# Altium PCB FPC_15ICS_80LEDS_150MM.PcbDoc (part 1 of 2)
Units mil, origin at the board's own origin, x right, y up, seen from the top; angles counter-clockwise.
Board outline 6000 x 4000 mil, 2 copper layers (Top Layer, Bottom Layer); 126 components, 275 nets, 763 pads, 146 vias.
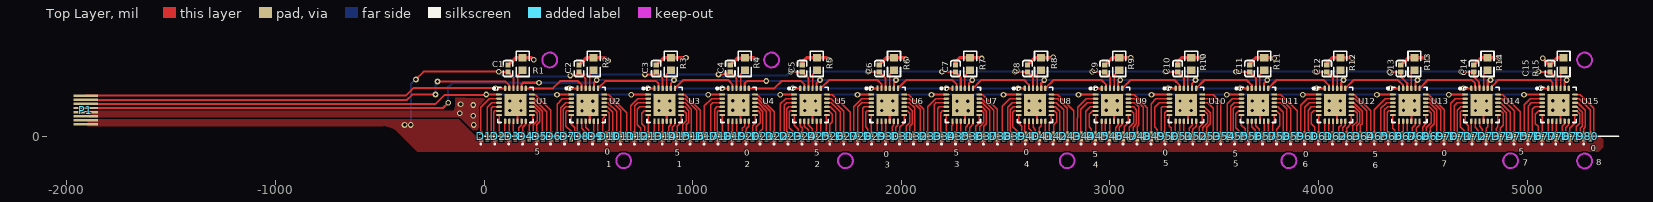
[diagram p0: Top Layer view]
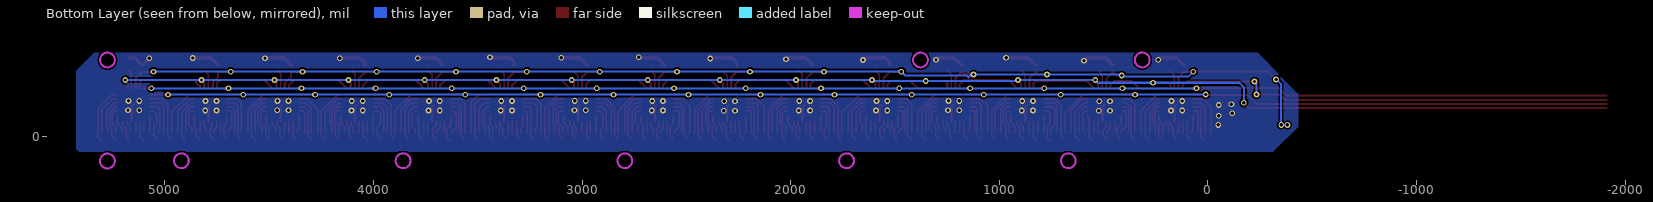
[diagram p1: Bottom Layer view, seen from below]

## Layer stack, top to bottom
Top Solder: solder mask 0.4, Solder Resist, Dk 3.5
Top Layer: signal copper 1.4
Dielectric 1: dielectric 12.6, FR-4, Dk 4.8
Bottom Layer: signal copper 1.4
Bottom Solder: solder mask 0.4, Solder Resist, Dk 3.5

## Board outline
-25770,-29925 -19770,-29925 -19770,-25925 -25770,-25925

## Design rules (kind name [scope] priority, off if disabled: settings)
Clearance [All] p1: gap=6
PolygonConnect [All] p1: connectstyle=Direct reliefconductorwidth=10 reliefentries=4 polygonreliefangle="90 Angle" airgapwidth=10
RoutingVias [All] p1: holewidth=28 width=50 viastyle="Through Hole" minholewidth=28 minwidth=50 maxholewidth=28 maxwidth=50
SolderMaskExpansion [All] p1: expansion=4
Width [All] p1: maxlimit=100 minlimit=6 preferedwidth=6
30 further rules are at their usual default settings.

## Components (designator, comment, footprint, x,y, rotation, side; value= is the part's Value field where it differs from the comment)
C1 "100nF (104) 10% 50V" 0402_C 115,325 r270 top
C2 "100nF (104) 10% 50V" 0402_C 455,325 r270 top
C3 "100nF (104) 10% 50V" 0402_C 825,325 r270 top
C4 "100nF (104) 10% 50V" 0402_C 1180,325 r270 top
C5 "100nF (104) 10% 50V" 0402_C 1525,325 r270 top
C6 "100nF (104) 10% 50V" 0402_C 1895,325 r270 top
C7 "100nF (104) 10% 50V" 0402_C 2260,325 r270 top
C8 "100nF (104) 10% 50V" 0402_C 2605,325 r270 top
C9 "100nF (104) 10% 50V" 0402_C 2975,325 r270 top
C10 "100nF (104) 10% 50V" 0402_C 3325,325 r270 top
C11 "100nF (104) 10% 50V" 0402_C 3670,325 r270 top
C12 "100nF (104) 10% 50V" 0402_C 4040,325 r270 top
C13 "100nF (104) 10% 50V" 0402_C 4395,325 r270 top
C14 "100nF (104) 10% 50V" 0402_C 4745,325 r270 top
C15 "100nF (104) 10% 50V" 0402_C 5110,325 r270 top
D1 "FC-B1010RGBT-HG-1010" LED-SMD-0.385X0.45X0.45 0,0 r0 top
D2 "FC-B1010RGBT-HG-1010" LED-SMD-0.385X0.45X0.45 66.93,0 r0 top
D3 "FC-B1010RGBT-HG-1010" LED-SMD-0.385X0.45X0.45 133.86,0 r0 top
D4 "FC-B1010RGBT-HG-1010" LED-SMD-0.385X0.45X0.45 200.79,0 r0 top
D5 "FC-B1010RGBT-HG-1010" LED-SMD-0.385X0.45X0.45 267.72,0 r0 top
D6 "FC-B1010RGBT-HG-1010" LED-SMD-0.385X0.45X0.45 334.65,0 r0 top
D7 "FC-B1010RGBT-HG-1010" LED-SMD-0.385X0.45X0.45 401.57,0 r0 top
D8 "FC-B1010RGBT-HG-1010" LED-SMD-0.385X0.45X0.45 468.5,0 r0 top
D9 "FC-B1010RGBT-HG-1010" LED-SMD-0.385X0.45X0.45 535.43,0 r0 top
D10 "FC-B1010RGBT-HG-1010" LED-SMD-0.385X0.45X0.45 602.36,0 r0 top
D11 "FC-B1010RGBT-HG-1010" LED-SMD-0.385X0.45X0.45 669.29,0 r0 top
D12 "FC-B1010RGBT-HG-1010" LED-SMD-0.385X0.45X0.45 736.22,0 r0 top
D13 "FC-B1010RGBT-HG-1010" LED-SMD-0.385X0.45X0.45 803.15,0 r0 top
D14 "FC-B1010RGBT-HG-1010" LED-SMD-0.385X0.45X0.45 870.08,0 r0 top
D15 "FC-B1010RGBT-HG-1010" LED-SMD-0.385X0.45X0.45 937.01,0 r0 top
D16 "FC-B1010RGBT-HG-1010" LED-SMD-0.385X0.45X0.45 1003.94,0 r0 top
D17 "FC-B1010RGBT-HG-1010" LED-SMD-0.385X0.45X0.45 1070.87,0 r0 top
D18 "FC-B1010RGBT-HG-1010" LED-SMD-0.385X0.45X0.45 1137.8,0 r0 top
D19 "FC-B1010RGBT-HG-1010" LED-SMD-0.385X0.45X0.45 1204.72,0 r0 top
D20 "FC-B1010RGBT-HG-1010" LED-SMD-0.385X0.45X0.45 1271.65,0 r0 top
D21 "FC-B1010RGBT-HG-1010" LED-SMD-0.385X0.45X0.45 1338.58,0 r0 top
D22 "FC-B1010RGBT-HG-1010" LED-SMD-0.385X0.45X0.45 1405.51,0 r0 top
D23 "FC-B1010RGBT-HG-1010" LED-SMD-0.385X0.45X0.45 1472.44,0 r0 top
D24 "FC-B1010RGBT-HG-1010" LED-SMD-0.385X0.45X0.45 1539.37,0 r0 top
D25 "FC-B1010RGBT-HG-1010" LED-SMD-0.385X0.45X0.45 1606.3,0 r0 top
D26 "FC-B1010RGBT-HG-1010" LED-SMD-0.385X0.45X0.45 1673.23,0 r0 top
D27 "FC-B1010RGBT-HG-1010" LED-SMD-0.385X0.45X0.45 1740,0 r0 top
D28 "FC-B1010RGBT-HG-1010" LED-SMD-0.385X0.45X0.45 1807.09,0 r0 top
D29 "FC-B1010RGBT-HG-1010" LED-SMD-0.385X0.45X0.45 1874.02,0 r0 top
D30 "FC-B1010RGBT-HG-1010" LED-SMD-0.385X0.45X0.45 1940.94,0 r0 top
D31 "FC-B1010RGBT-HG-1010" LED-SMD-0.385X0.45X0.45 2007.87,0 r0 top
D32 "FC-B1010RGBT-HG-1010" LED-SMD-0.385X0.45X0.45 2074.8,0 r0 top
D33 "FC-B1010RGBT-HG-1010" LED-SMD-0.385X0.45X0.45 2141.73,0 r0 top
D34 "FC-B1010RGBT-HG-1010" LED-SMD-0.385X0.45X0.45 2208.66,0 r0 top
D35 "FC-B1010RGBT-HG-1010" LED-SMD-0.385X0.45X0.45 2275.59,0 r0 top
D36 "FC-B1010RGBT-HG-1010" LED-SMD-0.385X0.45X0.45 2342.52,0 r0 top
D37 "FC-B1010RGBT-HG-1010" LED-SMD-0.385X0.45X0.45 2409.45,0 r0 top
D38 "FC-B1010RGBT-HG-1010" LED-SMD-0.385X0.45X0.45 2476.38,0 r0 top
D39 "FC-B1010RGBT-HG-1010" LED-SMD-0.385X0.45X0.45 2543.31,0 r0 top
D40 "FC-B1010RGBT-HG-1010" LED-SMD-0.385X0.45X0.45 2610.24,0 r0 top
D41 "FC-B1010RGBT-HG-1010" LED-SMD-0.385X0.45X0.45 2677.17,0 r0 top
D42 "FC-B1010RGBT-HG-1010" LED-SMD-0.385X0.45X0.45 2744.09,0 r0 top
D43 "FC-B1010RGBT-HG-1010" LED-SMD-0.385X0.45X0.45 2811.02,0 r0 top
D44 "FC-B1010RGBT-HG-1010" LED-SMD-0.385X0.45X0.45 2877.95,0 r0 top
D45 "FC-B1010RGBT-HG-1010" LED-SMD-0.385X0.45X0.45 2944.88,0 r0 top
D46 "FC-B1010RGBT-HG-1010" LED-SMD-0.385X0.45X0.45 3011.81,0 r0 top
D47 "FC-B1010RGBT-HG-1010" LED-SMD-0.385X0.45X0.45 3078.74,0 r0 top
D48 "FC-B1010RGBT-HG-1010" LED-SMD-0.385X0.45X0.45 3145.67,0 r0 top
D49 "FC-B1010RGBT-HG-1010" LED-SMD-0.385X0.45X0.45 3212.6,0 r0 top
D50 "FC-B1010RGBT-HG-1010" LED-SMD-0.385X0.45X0.45 3279.53,0 r0 top
D51 "FC-B1010RGBT-HG-1010" LED-SMD-0.385X0.45X0.45 3346.46,0 r0 top
D52 "FC-B1010RGBT-HG-1010" LED-SMD-0.385X0.45X0.45 3413.39,0 r0 top
D53 "FC-B1010RGBT-HG-1010" LED-SMD-0.385X0.45X0.45 3480.31,0 r0 top
D54 "FC-B1010RGBT-HG-1010" LED-SMD-0.385X0.45X0.45 3547.24,0 r0 top
D55 "FC-B1010RGBT-HG-1010" LED-SMD-0.385X0.45X0.45 3614.17,0 r0 top
D56 "FC-B1010RGBT-HG-1010" LED-SMD-0.385X0.45X0.45 3681.1,0 r0 top
D57 "FC-B1010RGBT-HG-1010" LED-SMD-0.385X0.45X0.45 3748.03,0 r0 top
D58 "FC-B1010RGBT-HG-1010" LED-SMD-0.385X0.45X0.45 3814.96,0 r0 top
D59 "FC-B1010RGBT-HG-1010" LED-SMD-0.385X0.45X0.45 3881.89,0 r0 top
D60 "FC-B1010RGBT-HG-1010" LED-SMD-0.385X0.45X0.45 3948.82,0 r0 top
D61 "FC-B1010RGBT-HG-1010" LED-SMD-0.385X0.45X0.45 4015.75,0 r0 top
D62 "FC-B1010RGBT-HG-1010" LED-SMD-0.385X0.45X0.45 4082.68,0 r0 top
D63 "FC-B1010RGBT-HG-1010" LED-SMD-0.385X0.45X0.45 4150,0 r0 top
D64 "FC-B1010RGBT-HG-1010" LED-SMD-0.385X0.45X0.45 4216.54,0 r0 top
D65 "FC-B1010RGBT-HG-1010" LED-SMD-0.385X0.45X0.45 4283.46,0 r0 top
D66 "FC-B1010RGBT-HG-1010" LED-SMD-0.385X0.45X0.45 4350.39,0 r0 top
D67 "FC-B1010RGBT-HG-1010" LED-SMD-0.385X0.45X0.45 4417.32,0 r0 top
D68 "FC-B1010RGBT-HG-1010" LED-SMD-0.385X0.45X0.45 4484.25,0 r0 top
D69 "FC-B1010RGBT-HG-1010" LED-SMD-0.385X0.45X0.45 4551.18,0 r0 top
D70 "FC-B1010RGBT-HG-1010" LED-SMD-0.385X0.45X0.45 4618.11,0 r0 top
D71 "FC-B1010RGBT-HG-1010" LED-SMD-0.385X0.45X0.45 4685.04,0 r0 top
D72 "FC-B1010RGBT-HG-1010" LED-SMD-0.385X0.45X0.45 4751.97,0 r0 top
D73 "FC-B1010RGBT-HG-1010" LED-SMD-0.385X0.45X0.45 4818.9,0 r0 top
D74 "FC-B1010RGBT-HG-1010" LED-SMD-0.385X0.45X0.45 4885.83,0 r0 top
D75 "FC-B1010RGBT-HG-1010" LED-SMD-0.385X0.45X0.45 4952.76,0 r0 top
D76 "FC-B1010RGBT-HG-1010" LED-SMD-0.385X0.45X0.45 5019.69,0 r0 top
D77 "FC-B1010RGBT-HG-1010" LED-SMD-0.385X0.45X0.45 5086.61,0 r0 top
D78 "FC-B1010RGBT-HG-1010" LED-SMD-0.385X0.45X0.45 5153.54,0 r0 top
D79 "FC-B1010RGBT-HG-1010" LED-SMD-0.385X0.45X0.45 5220.47,0 r0 top
D80 "FC-B1010RGBT-HG-1010" LED-SMD-0.385X0.45X0.45 5287.4,0 r0 top
P1 "fpc_0.5mmX8P" GOLDFIGER_FPC_8 -1910,125.98 r270 top
R1 "2.2K ±1%" 0603_R 185,347.05 r90 top
R2 "2.2K" 0603_R 525,347.05 r90 top
R3 "2K" 0603_R 895,347.05 r90 top
R4 "2K" 0603_R 1250,347.05 r90 top
R5 "2K" 0603_R 1595,347.05 r90 top
R6 "2K" 0603_R 1965,347.05 r90 top
R7 "1.5K" 0603_R 2330,347.05 r90 top
R8 "1.5K" 0603_R 2670,347.05 r90 top
R9 "1.5K" 0603_R 3045,347.05 r90 top
R10 "1.5K" 0603_R 3390,347.05 r90 top
R11 "1.5K" 0603_R 3740,347.05 r90 top
R12 "1.5K" 0603_R 4105,347.05 r90 top
R13 "1.5K" 0603_R 4460,347.05 r90 top
R14 "1.5K" 0603_R 4810,347.05 r90 top
R15 "1.5K" 0603_R 5175,347.05 r90 top
U1 "SM16106_QFN24" QFN-24_4x4x05tcp 150.47,151.26 r270 top
U2 "SM16106_QFN24" QFN-24_4x4x05tcp 496.81,151.26 r270 top
U3 "SM16106_QFN24" QFN-24_4x4x05tcp 865.75,151.26 r270 top
U4 "SM16106_QFN24" QFN-24_4x4x05tcp 1220,151.26 r270 top
U5 "SM16106_QFN24" QFN-24_4x4x05tcp 1565,151.26 r270 top
U6 "SM16106_QFN24" QFN-24_4x4x05tcp 1935,151.26 r270 top
U7 "SM16106_QFN24" QFN-24_4x4x05tcp 2295,151.26 r270 top
U8 "SM16106_QFN24" QFN-24_4x4x05tcp 2641.34,151.26 r270 top
U9 "SM16106_QFN24" QFN-24_4x4x05tcp 3010.28,151.26 r270 top
U10 "SM16106_QFN24" QFN-24_4x4x05tcp 3364.53,151.26 r270 top
U11 "SM16106_QFN24" QFN-24_4x4x05tcp 3709.53,151.26 r270 top
U12 "SM16106_QFN24" QFN-24_4x4x05tcp 4079.53,151.26 r270 top
U13 "SM16106_QFN24" QFN-24_4x4x05tcp 4435.47,151.26 r270 top
U14 "SM16106_QFN24" QFN-24_4x4x05tcp 4781.81,151.26 r270 top
U15 "SM16106_QFN24" QFN-24_4x4x05tcp 5150.75,151.26 r270 top

## Footprints (in the part's own frame and the unit in brackets; to place one, negate y for a bottom-side part, rotate by r counter-clockwise, add the part's x,y. Pads: shape width x height; smd on the part's side, far side on the other; paste and mask are expansions set on the pad)
0402_C [mm]
  rect 0.6x0.65 smd mask+0.051: 1(-0.425,0) 2(0.425,0)
  silkscreen extent -0.97,-0.58 0.97,0.58, body extent -0.48,-0.3 0.52,0.3, height 0.2
0603_R [mm]
  rect 0.93x0.98 smd: 1(-0.77,0) 2(0.77,0)
  silkscreen extent -1.53,-0.79 1.54,0.79, body extent -0.85,-0.4 0.85,0.4, height 0.56
GOLDFIGER_FPC_8 [mm]
  rect 0.3x3 smd: 1(-1.75,0) 2(-1.25,0) 3(-0.75,0) 4(-0.25,0) 5(0.25,0) 6(0.75,0) 7(1.25,0) 8(1.75,0)
LED-SMD-0.385X0.45X0.45 [mm]
  rect 0.45x0.45 smd: 1(-0.385,-0.385) 2(-0.385,0.385) 3(0.385,0.385) 4(0.385,-0.385)
  silkscreen extent -0.46,-0.99 -0.36,-0.89
QFN-24_4x4x05tcp [mm]
  rect 2.68x2.68 smd mask+0.051: 0(0,0)
  oval 0.28x0.7 smd mask+0.051: 1(-1.25,-2) 2(-0.75,-2) 3(-0.25,-2) 4(0.25,-2) 5(0.75,-2) 6(1.25,-2) 13(1.25,2) 14(0.75,2) 15(0.25,2) 16(-0.25,2) 17(-0.75,2) 18(-1.25,2)
  oval 0.7x0.28 smd mask+0.051: 7(2,-1.25) 8(2,-0.75) 9(2,-0.25) 10(2,0.25) 11(2,0.75) 12(2,1.25) 19(-2,1.25) 20(-2,0.75) 21(-2,0.25) 22(-2,-0.25) 23(-2,-0.75) 24(-2,-1.25)
  silkscreen extent -2.15,-2.72 2.15,2.15

## Part data
C1 C2 C3 C4 C5 C6 C7 C8 C9 C10 C11 C12 C13 C14 C15: library part "0603 100nF (104) 10% 50V", "贴片电容"
D1 D2 D3 D4 D5 D6 D7 D8 D9 D10 D11 D12 D13 D14 D15 D16 D17 D18 D19 D20 D21 D22 D23 D24 D25 D26 D27 D28 D29 D30 D31 D32 D33 D34 D35 D36 D37 D38 D39 D40 D41 D42 D43 D44 D45 D46 D47 D48 D49 D50 D51 D52 D53 D54 D55 D56 D57 D58 D59 D60 D61 D62 D63 D64 D65 D66 D67 D68 D69 D70 D71 D72 D73 D74 D75 D76 D77 D78 D79 D80: library part LED_RGB_1010
R1 R4 R7 R10 R13: library part "0603 6.2KΩ (6201) 1%", "贴片电阻"
R2 R5 R8 R11 R14: library part "0603 4.7KΩ (4701) 1%", "贴片电阻"
R3 R6 R9 R12 R15: library part "0603 3.6KΩ (3601) 1%", "贴片电阻"

## Via types
v1: diameter 27.56, hole 15.75, Top Layer to Bottom Layer, tented both sides, 146 vias

## Nets (pads, with @x,y where several pads share a name; then routed paths per layer and width w, separated by ;. In a path a pad name is that pad's centre, name@x,y a point inside that pad or via, vN(x,y) a via of type N, cw(c..) or ccw(c..) an arc to the next point about the centre after c; other vN are vias at no path point)
4V1: C1.2 C2.2 C3.2 C4.2 C5.2 C6.2 C7.2 C8.2 C9.2 C10.2 C11.2 C12.2 C13.2 C14.2 C15.2 D1.1 D2.1 D3.1 D4.1 D5.1 D6.1 D7.1 D8.1 D9.1 D10.1 D11.1 D12.1 D13.1 D14.1 D15.1 D16.1 D17.1 D18.1 D19.1 D20.1 D21.1 D22.1 D23.1 D24.1 D25.1 D26.1 D27.1 D28.1 D29.1 D30.1 D31.1 D32.1 D33.1 D34.1 D35.1 D36.1 D37.1 D38.1 D39.1 D40.1 D41.1 D42.1 D43.1 D44.1 D45.1 D46.1 D47.1 D48.1 D49.1 D50.1 D51.1 D52.1 D53.1 D54.1 D55.1 D56.1 D57.1 D58.1 D59.1 D60.1 D61.1 D62.1 D63.1 D64.1 D65.1 D66.1 D67.1 D68.1 D69.1 D70.1 D71.1 D72.1 D73.1 D74.1 D75.1 D76.1 D77.1 D78.1 D79.1 D80.1 P1.7 P1.8 U1.22 U2.22 U3.22 U4.22 U5.22 U6.22 U7.22 U8.22 U9.22 U10.22 U11.22 U12.22 U13.22 U14.22 U15.22 | length 7912.7
  Top Layer w10: v1(-327,273) -290,310 v1(70,310) ; v1@71.73,308.27 C1.2@115,308.27 140.63,282.64 U1.22@140.63,230 ; v1(413,292) 438.73,292 C2.2@455,308.27 486.97,276.3 U2.22@486.97,230 ; v1(771,297) 813.73,297 C3.2@825,308.27 855.91,277.36 U3.22@855.91,230 ; v1@1124,305.54 v1(1124,297) 1127.27,300.27 1172,300.27 C4.2@1180,308.27 1210.16,278.11 U4.22@1210.16,230 ; v1(1470,310) 1471.73,308.27 C5.2@1525,308.27 1555.16,278.11 U5.22@1555.16,230 ; v1(1840,310) 1841.73,308.27 C6.2@1895,308.27 1925.16,278.11 U6.22@1925.16,230 ; v1(2195,310) 2196.73,308.27 C7.2@2260,308.27 2285.16,283.11 U7.22@2285.16,230 ; v1(2545,310) 2546.73,308.27 C8.2@2605,308.27 2631.5,281.77 U8.22@2631.5,230 ; v1(2915,310) 2916.73,308.27 C9.2@2975,308.27 3000.43,282.83 U9.22@3000.43,230 ; v1(3265,310) 3266.73,308.27 C10.2@3325,308.27 3354.69,278.58 U10.22@3354.69,230 ; v1(3605,310) 3606.73,308.27 C11.2@3670,308.27 3699.69,278.58 U11.22@3699.69,230 ; v1(3985,310) 3986.73,308.27 C12.2@4040,308.27 4069.69,278.58 U12.22@4069.69,230 ; v1(4340,310) 4341.73,308.27 C13.2@4395,308.27 4395,285 4425.63,254.37 U13.22@4425.63,230 ; v1(4685,310) 4686.73,308.27 C14.2@4745,308.27 4745,285.46 4769.11,261.35 4769.11,247.62 4770.8,245.94 4770.8,231.17 U14.22@4771.97,230 ; v1(5055,310) 5056.73,308.27 C15.2@5110,308.27 5139.73,278.54 5139.73,231.17 U15.22@5140.91,230
  Bottom Layer w10: v1(-381,55) v1(-351,55) -351,250 v1@-328,273 ; v1(70,310) 94,286 407,286 v1(413,292) 417.78,296.78 770.78,296.78 v1(771,297) v1(1124,297) 1133.86,297 1147.86,283 1156.64,291.78 1451.78,291.78 v1(1470,310) v1(1840,310) v1(2195,310) v1(2545,310) v1(2915,310) v1(3265,310) v1(3605,310) v1(3985,310) v1(4340,310) v1(4685,310) v1(5055,310)
ENABLE1: P1.4 U1.20 U2.20 U3.20 U4.20 U5.20 U6.20 U7.20 U8.20 U9.20 U10.20 U11.20 U12.20 U13.20 U14.20 U15.20 | length 8048.5
  Top Layer w10: P1.4@-1910,135.83 -197.17,135.83 v1@-172.5,160.5 ; U1.20@180,230 180,250 187,257 v1(263,257) ; U2.20@526.34,230 526.34,256.34 v1(540,270) ; U3.20@895.28,230 895.28,255.28 v1(910,270) ; U4.20@1249.53,230 1249.53,254.53 1260,265 v1(1353,265) ; U5.20@1594.53,230 1594.53,254.53 v1(1610,270) ; U6.20@1964.53,230 1964.53,259.53 v1(1975,270) ; U7.20@2324.53,230 2324.53,254.53 v1(2340,270) ; U8.20@2670.87,230 2670.87,255.87 v1(2685,270) ; U9.20@3039.8,230 3039.8,259.8 v1(3050,270) ; U10.20@3394.06,230 3394.06,254.06 v1(3410,270) ; U11.20@3739.06,230 3739.06,254.06 v1(3755,270) ; U12.20@4109.06,230 4109.06,259.06 v1(4120,270) ; U13.20@4465,230 4465,260 v1(4475,270) ; U14.20@4811.34,230 4811.34,268.66 4812.68,270 v1(4825,270) ; U15.20@5180.28,230 5180.28,260.28 v1(5190,270) v1@5180.55,270
  Bottom Layer w10: v1(-172.03,160.97) -172.03,235.97 -151,257 v1(263,257) 527,257 v1(540,270) v1(910,270) 915,265 v1(1353,265) 1605,265 v1(1610,270) v1(1975,270) v1(2340,270) v1(2685,270) v1(3050,270) v1(3410,270) v1(3755,270) v1(4120,270) v1(4475,270) v1(4825,270) v1(5190,270)
GND: C1.1 C2.1 C3.1 C4.1 C5.1 C6.1 C7.1 C8.1 C9.1 C10.1 C11.1 C12.1 C13.1 C14.1 C15.1 P1.5 P1.6 R1.2 R2.2 R3.2 R4.2 R5.2 R6.2 R7.2 R8.2 R9.2 R10.2 R11.2 R12.2 R13.2 R14.2 R15.2 U1.0 U1.10 U2.0 U2.10 U3.0 U3.10 U4.0 U4.10 U5.0 U5.10 U6.0 U6.10 U7.0 U7.10 U8.0 U8.10 U9.0 U9.10 U10.0 U10.10 U11.0 U11.10 U12.0 U12.10 U13.0 U13.10 U14.0 U14.10 U15.0 U15.10 | length 3379.2
  Top Layer w10: U1.0@150.47,151.26 160.31,141.42 U1.10@160.31,72.52 ; U2.0@496.81,151.26 506.65,141.42 U2.10@506.65,72.52 ; U3.0@865.75,151.26 875.59,141.42 U3.10@875.59,72.52 ; U4.0@1220,151.26 1229.84,141.42 U4.10@1229.84,72.52 ; U5.0@1565,151.26 1574.84,141.42 U5.10@1574.84,72.52 ; U6.0@1935,151.26 1944.84,141.42 U6.10@1944.84,72.52 ; U7.0@2295,151.26 2304.84,141.42 U7.10@2304.84,72.52 ; U8.0@2641.34,151.26 2651.18,141.42 U8.10@2651.18,72.52 ; U9.0@3010.28,151.26 3020.12,141.42 U9.10@3020.12,72.52 ; U10.0@3364.53,151.26 3374.37,141.42 U10.10@3374.37,72.52 ; U11.0@3709.53,151.26 3719.37,141.42 U11.10@3719.37,72.52 ; U12.0@4079.53,151.26 4089.37,141.42 U12.10@4089.37,72.52 ; U13.0@4435.47,151.26 4445.31,141.42 U13.10@4445.31,72.52 ; U14.0@4781.81,151.26 4791.65,141.42 U14.10@4791.65,72.52 ; U15.0@5150.75,151.26 5160.59,141.42 U15.10@5160.59,72.52
  Top Layer w16: C1.1@115,341.73 150.63,377.36 R1.2@185,377.36 227.64,377.36 v1(238,367) ; C2.1@455,341.73 490.63,377.36 R2.2@525,377.36 579.64,377.36 v1(594,363) ; C3.1@825,341.73 860.63,377.36 R3.2@895,377.36 v1(967.36,377.36) ; C4.1@1180,341.73 1213.27,375 1247.64,375 R4.2@1250,377.36 1293.64,377.36 v1(1304,367) ; C5.1@1525,341.73 1525,355 1547.36,377.36 R5.2@1595,377.36 1641.64,377.36 v1(1653,366) ; C6.1@1895,341.73 1895,344 1928.36,377.36 R6.2@1965,377.36 2015.64,377.36 v1(2023,370) ; C7.1@2260,341.73 2260,358 2279.36,377.36 R7.2@2330,377.36 2372.64,377.36 v1@2378,372 ; C8.1@2605,341.73 2640.63,377.36 R8.2@2670,377.36 v1@2721.64,377.36 ; C9.1@2975,341.73 2975,342 3010.36,377.36 R9.2@3045,377.36 v1@3099.64,377.36 ; C10.1@3325,341.73 3325,358 3344.36,377.36 R10.2@3390,377.36 3440.36,377.36 v1(3442,379) ; C11.1@3670,341.73 3670,348 3699.36,377.36 R11.2@3740,377.36 v1@3785.64,377.36 ; C12.1@4040,341.73 4040,351 4066.36,377.36 R12.2@4105,377.36 v1@4159.64,377.36 ; C13.1@4395,341.73 4430.63,377.36 R13.2@4460,377.36 v1@4518,377.36 ; C14.1@4745,341.73 4780.63,377.36 R14.2@4810,377.36 v1@4865.64,377.36 ; v1(5075,374) 5107.27,341.73 C15.1@5110,341.73 5145.63,377.36 R15.2@5175,377.36
  other v1: -50,55 -52,99 -117,111 469,123 523,123 2267,123 2321,123 123,124 177,124 838,124 892,124 1537,124 1591,124 1907,124 1961,124 2612,124 2666,124 3336,124 3390,124 3682,124 3736,124 4052,124 4106,124 4753,124 4807,124 1192,125 1246,125 2983,125 3037,125 4408,125 4462,125 5123,125 5177,125 -52,150 -112.53,154.47 469,168 521,168 2267,168 2319,168 123,169 175,169 838,169 890,169 1537,169 1589,169 1907,169 1959,169 2612,169 2664,169 3336,169 3388,169 3682,169 3734,169 4052,169 4104,169 4753,169 4805,169 1192,170 1244,170 2983,170 3035,170 4408,170 4460,170 5123,170 5175,170 2386,373 4520,374 3788,375 4162,375 4867,376 3100,377 2728,379
LATCH1: P1.3 U1.1 U2.1 U3.1 U4.1 U5.1 U6.1 U7.1 U8.1 U9.1 U10.1 U11.1 U12.1 U13.1 U14.1 U15.1 | length 8026.2
  Top Layer w10: P1.3@-1910,155.51 -232.49,155.51 -189,199 9,199 v1(10.47,200.47) U1.1@71.73,200.47 ; v1(350,200) 350.47,200.47 U2.1@418.07,200.47 ; v1(705,200) 705.47,200.47 U3.1@787.01,200.47 ; v1(1075,200) 1075.47,200.47 U4.1@1141.26,200.47 ; v1(1420,200) 1420.47,200.47 U5.1@1486.26,200.47 ; v1(1790,200) 1790.47,200.47 U6.1@1856.26,200.47 ; v1(2145,200) 2145.47,200.47 U7.1@2216.26,200.47 ; v1(2490,200) 2490.47,200.47 U8.1@2562.6,200.47 ; v1(2850,200) 2850.47,200.47 U9.1@2931.54,200.47 ; v1(3200,200) 3200.47,200.47 U10.1@3285.79,200.47 ; v1(3560,200) 3560.47,200.47 U11.1@3630.79,200.47 ; v1(3925,200) 3925.47,200.47 U12.1@4000.79,200.47 ; v1(4280,200) 4280.47,200.47 U13.1@4356.73,200.47 ; v1(4625,200) 4625.47,200.47 U14.1@4703.07,200.47 ; v1(4985,200) 5071.54,200 U15.1@5072.01,200.47
  Bottom Layer w10: v1(10.47,200.47) 4984.53,200.47 v1(4985,200)
NetD1_2: D1.2 U1.2 | length 233.5
  Top Layer w6: D1.2@-15.16,15.16 -15.16,139.84 25.79,180.79 U1.2@71.73,180.79 U1.2@76.73,180.79
NetD1_3: D1.3 U1.3 | length 195.2
  Top Layer w6: D1.3@15.16,15.16 15.16,140.16 36.1,161.1 U1.3@71.73,161.1 U1.3@76.73,161.1
NetD1_4: D1.4 U1.4 | length 205.5
  Top Layer w6: D1.4@15.16,-15.16 19.84,-15.16 33.91,-1.09 33.91,133.91 41.42,141.42 U1.4@71.73,141.42 U1.4@76.73,141.42
NetD2_2: D2.2 U1.5 | length 131.4
  Top Layer w6: D2.2@51.77,15.16 45.91,21.02 45.91,115.91 51.73,121.73 U1.5@71.73,121.73
NetD2_3: D2.3 U1.6 | length 91.2
  Top Layer w6: U1.6@71.73,102.05 71.73,25.52 D2.3@82.09,15.16
NetD2_4: D2.4 U1.7 | length 95.7
  Top Layer w6: D2.4@82.09,-15.16 82.21,-15.16 99.95,2.57 99.95,71.21 U1.7@101.26,72.52
NetD3_2: D3.2 U1.8 | length 58.3
  Top Layer w6: D3.2@118.7,15.16 120.94,17.41 U1.8@120.94,72.52
NetD3_3: D3.3 U1.9 | length 60.8
  Top Layer w6: U1.9@140.63,72.52 140.63,23.55 D3.3@149.02,15.16
NetD3_4: D3.4 U1.11 | length 100.6
  Top Layer w6: D3.4@149.02,-15.16 149.14,-15.16 166.88,2.57 166.88,41.88 180,55 U1.11@180,72.52
NetD4_2: D4.2 U1.12 | length 63.2
  Top Layer w6: D4.2@185.63,15.16 185.63,43.66 199.68,57.71 U1.12@199.68,72.52
NetD4_3: D4.3 U1.13 | length 94.5
  Top Layer w6: D4.3@215.95,15.16 215.95,55.95 234.21,74.21 U1.13@234.21,102.05
NetD4_4: D4.4 U1.14 | length 169.3
  Top Layer w6: D4.4@215.95,-15.16 219.84,-15.16 234.7,-0.3 234.7,54.7 255,75 255,110 243.27,121.73 U1.14@234.21,121.73
NetD5_2: D5.2 U1.15 | length 154.5
  Top Layer w6: U1.15@229.21,141.42 240.55,141.42 267,114.97 267,70.03 252.56,55.59 D5.2@252.56,15.16
NetD5_3: D5.3 U1.16 | length 173.5
  Top Layer w6: U1.16@229.21,161.1 238.32,161.1 280,119.42 280,18.04 D5.3@282.88,15.16
NetD5_4: D5.4 U1.17 | length 238.4
  Top Layer w6: U1.17@229.21,180.79 238.32,180.79 300.74,118.37 300.74,2.57 283,-15.16 D5.4@282.88,-15.16
NetD6_2: D6.2 U1.18 | length 231.7
  Top Layer w6: U1.18@229.21,200.47 244.53,200.47 319.49,125.51 D6.2@319.49,15.16
NetD6_3: D6.3 U2.2 | length 206.9
  Top Layer w6: D6.3@349.81,15.16 349.81,154.81 375.79,180.79 U2.2@406.26,180.79
NetD6_4: D6.4 U2.3 | length 208.9
  Top Layer w6: D6.4@349.81,-15.16 349.93,-15.16 367.66,2.57 367.66,27.75 367.35,28.06 367.35,137.35 391.1,161.1 U2.3@406.26,161.1
NetD7_2: D7.2 U2.4 | length 148.8
  Top Layer w6: D7.2@386.41,15.16 379.66,21.91 379.66,129.66 391.42,141.42 U2.4@406.26,141.42
NetD7_3: D7.3 U2.5 | length 136.5
  Top Layer w6: U2.5@414.13,121.73 396.73,121.73 391.66,116.66 391.66,48.34 416.73,23.27 D7.3@416.73,15.16
NetD7_4: D7.4 U2.6 | length 131.5
  Top Layer w6: D7.4@416.73,-15.16 416.86,-15.16 434.59,2.57 434.59,40.41 418.07,56.93 U2.6@418.07,102.05
NetD8_2: D8.2 U2.7 | length 59.7
  Top Layer w6: U2.7@447.6,72.52 447.6,20.91 D8.2@453.34,15.16
NetD8_3: D8.3 U2.8 | length 64.1
  Top Layer w6: U2.8@467.28,72.52 467.28,37.72 483.66,21.34 D8.3@483.66,15.16
NetD8_4: D8.4 U2.9 | length 101.2
  Top Layer w6: D8.4@483.66,-15.16 483.79,-15.16 501.52,2.57 501.52,28.48 486.97,43.03 U2.9@486.97,72.52
NetD9_2: D9.2 U2.11 | length 59.9
  Top Layer w6: D9.2@520.27,15.16 526.34,21.23 U2.11@526.34,72.52
NetD9_3: D9.3 U2.12 | length 59.3
  Top Layer w6: U2.12@546.02,72.52 546.02,19.73 D9.3@550.59,15.16
NetD9_4: D9.4 U2.13 | length 133
  Top Layer w6: D9.4@550.59,-15.16 559.84,-15.16 569.34,-5.66 569.34,84.34 575.55,90.55 U2.13@575.55,102.05
NetD10_2: D10.2 U2.14 | length 129.4
  Top Layer w6: U2.14@575.55,121.73 588.27,121.73 600,110 600,28.08 587.2,15.28 D10.2@587.2,15.16
NetD10_3: D10.3 U2.15 | length 152.4
  Top Layer w6: U2.15@575.55,141.42 590.55,141.42 617.52,114.45 D10.3@617.52,15.16
NetD10_4: D10.4 U2.16 | length 220.5
  Top Layer w6: U2.16@575.55,161.1 593.9,161.1 635.38,119.62 635.38,0.38 619.84,-15.16 D10.4@617.52,-15.16
NetD11_2: D11.2 U2.17 | length 212
  Top Layer w6: U2.17@575.55,180.79 599.21,180.79 654.13,125.87 D11.2@654.13,15.16
NetD11_3: D11.3 U2.18 | length 242.7
  Top Layer w6: U2.18@575.55,200.47 596.5,200.47 684.45,112.52 D11.3@684.45,15.16
NetD11_4: D11.4 U3.2 | length 268.5
  Top Layer w6: D11.4@684.45,-15.16 684.58,-15.16 702.31,2.57 702.31,147.31 735.79,180.79 U3.2@787.01,180.79
NetD12_2: D12.2 U3.3 | length 203.1
  Top Layer w6: D12.2@721.06,15.16 721.06,146.06 736.1,161.1 U3.3@787.01,161.1
NetD12_3: D12.3 U3.4 | length 178.4
  Top Layer w6: D12.3@751.38,15.16 751.38,38.62 735,55 735,130 746.42,141.42 U3.4@787.01,141.42
NetD12_4: D12.4 U3.5 | length 180.9
  Top Layer w6: D12.4@751.38,-15.16 759.84,-15.16 770,-5 770,45 755,60 755,110 766.73,121.73 U3.5@787.01,121.73
NetD13_2: D13.2 U3.6 | length 87.3
  Top Layer w6: U3.6@787.01,102.05 787.01,16.14 D13.2@787.99,15.16
NetD13_3: D13.3 U3.7 | length 58.1
  Top Layer w6: U3.7@816.54,72.52 816.54,16.93 D13.3@818.31,15.16
NetD13_4: D13.4 U3.8 | length 98.9
  Top Layer w6: D13.4@818.31,-15.16 824.84,-15.16 836.22,-3.78 U3.8@836.22,72.52
NetD14_2: D14.2 U3.9 | length 57.8
  Top Layer w6: D14.2@854.92,15.16 855.91,16.15 U3.9@855.91,72.52
NetD14_3: D14.3 U3.11 | length 61.5
  Top Layer w6: D14.3@885.24,15.16 885.24,45.24 895.28,55.28 U3.11@895.28,72.52
NetD14_4: D14.4 U3.12 | length 100.1
  Top Layer w6: D14.4@885.24,-15.16 885.36,-15.16 903.1,2.57 903.1,43.1 914.96,54.96 U3.12@914.96,72.52
NetD15_2: D15.2 U3.13 | length 96.3
  Top Layer w6: D15.2@921.85,15.16 925,18.31 925,48.03 944.49,67.52 U3.13@944.49,102.05
NetD15_3: D15.3 U3.14 | length 132.6
  Top Layer w6: U3.14@944.49,121.73 958.27,121.73 970,110 970,75 952.17,57.17 D15.3@952.17,15.16
NetD15_4: D15.4 U3.15 | length 195.7
  Top Layer w6: U3.15@944.49,141.42 963.58,141.42 982,123 982,67 970.03,55.03 970.03,2.55 952.32,-15.16 D15.4@952.17,-15.16
NetD16_2: D16.2 U3.16 | length 180
  Top Layer w6: U3.16@944.49,161.1 963.9,161.1 994,131 994,20.38 D16.2@988.78,15.16
NetD16_3: D16.3 U3.17 | length 208.1
  Top Layer w6: U3.17@944.49,180.79 964.21,180.79 1019.1,125.9 D16.3@1019.1,15.16
NetD16_4: D16.4 U3.18 | length 271.4
  Top Layer w6: U3.18@944.49,200.47 961.5,200.47 1036.96,125.01 1036.96,2.57 1019.22,-15.16 D16.4@1019.1,-15.16
NetD17_2: D17.2 U4.2 | length 230.6
  Top Layer w6: D17.2@1055.71,15.16 1055.71,145.71 1090.79,180.79 U4.2@1141.26,180.79
NetD17_3: D17.3 U4.3 | length 195.3
  Top Layer w6: D17.3@1086.03,15.16 1086.03,151.03 1096.1,161.1 U4.3@1141.26,161.1
NetD17_4: D17.4 U4.4 | length 195.2
  Top Layer w6: D17.4@1086.03,-15.16 1087.71,-15.16 1105,2.13 1104.78,2.35 1104.78,129.78 1116.42,141.42 U4.4@1141.26,141.42
NetD18_2: D18.2 U4.5 | length 130.6
  Top Layer w6: D18.2@1122.64,15.16 1116.78,21.02 1116.78,116.78 1121.73,121.73 U4.5@1141.26,121.73
NetD18_3: D18.3 U4.6 | length 91.7
  Top Layer w6: U4.6@1141.26,102.05 1141.26,26.86 D18.3@1152.96,15.16
NetD18_4: D18.4 U4.7 | length 95.2
  Top Layer w6: D18.4@1152.96,-15.16 1153.08,-15.16 1170.81,2.57 U4.7@1170.79,72.52
NetD19_2: D19.2 U4.8 | length 57.7
  Top Layer w6: D19.2@1189.56,15.16 1190.47,16.07 U4.8@1190.47,72.52
NetD19_3: D19.3 U4.9 | length 61.4
  Top Layer w6: U4.9@1210.16,72.52 1210.16,24.89 D19.3@1219.88,15.16
NetD19_4: D19.4 U4.11 | length 100
  Top Layer w6: D19.4@1219.88,-15.16 1220.01,-15.16 1237.74,2.57 1237.74,37.74 1249.53,49.53 U4.11@1249.53,72.52
NetD20_2: D20.2 U4.12 | length 62.6
  Top Layer w6: D20.2@1256.49,15.16 1256.49,36.49 1269.21,49.21 U4.12@1269.21,72.52
NetD20_3: D20.3 U4.13 | length 91.8
  Top Layer w6: D20.3@1286.81,15.16 1286.81,51.81 1298.74,63.74 U4.13@1298.74,102.05
NetD20_4: D20.4 U4.14 | length 173.9
  Top Layer w6: D20.4@1286.81,-15.16 1289.84,-15.16 1305,0 1305,45 1325,65 1325,110 1313.27,121.73 U4.14@1298.74,121.73
NetD21_2: D21.2 U4.15 | length 156.4
  Top Layer w6: U4.15@1298.74,141.42 1313.58,141.42 1337,118 1337,37 1323.42,23.42 D21.2@1323.42,15.16
NetD21_3: D21.3 U4.16 | length 177.6
  Top Layer w6: U4.16@1298.74,161.1 1313.9,161.1 1353.74,121.26 D21.3@1353.74,15.16
NetD21_4: D21.4 U4.17 | length 241.5
  Top Layer w6: U4.17@1298.74,180.79 1311.18,180.79 1371.6,120.37 1371.6,1.6 1354.84,-15.16 D21.4@1353.74,-15.16
NetD22_2: D22.2 U4.18 | length 229
  Top Layer w6: U4.18@1298.74,200.47 1308.47,200.47 1390.35,118.59 D22.2@1390.35,15.16
NetD22_3: D22.3 U5.2 | length 216.5
  Top Layer w6: D22.3@1420.67,15.16 1420.67,155.67 1445.79,180.79 U5.2@1486.26,180.79
NetD22_4: D22.4 U5.3 | length 224.1
  Top Layer w6: D22.4@1420.67,-15.16 1420.8,-15.16 1439.42,3.47 1439.42,149.42 1451.1,161.1 U5.3@1486.26,161.1
NetD23_2: D23.2 U5.4 | length 157.7
  Top Layer w6: D23.2@1457.28,15.16 1451.42,21.02 1451.42,131.42 1461.42,141.42 U5.4@1486.26,141.42
NetD23_3: D23.3 U5.5 | length 138.6
  Top Layer w6: U5.5@1486.26,121.73 1466.73,121.73 1463.42,118.42 1463.42,41.58 D23.3@1490,15
NetD23_4: D23.4 U5.6 | length 132.6
  Top Layer w6: U5.6@1486.26,102.05 1486.26,53.74 1505.46,34.54 1505.46,2.57 1487.73,-15.16 D23.4@1487.6,-15.16
NetD24_2: D24.2 U5.7 | length 60.8
  Top Layer w6: U5.7@1515.79,72.52 1515.79,49.21 1524.21,40.79 D24.2@1524.21,15.16
NetD24_3: D24.3 U5.8 | length 65.3
  Top Layer w6: U5.8@1535.47,72.52 1535.47,49.53 1554.53,30.47 D24.3@1554.53,15.16
NetD24_4: D24.4 U5.9 | length 102.3
  Top Layer w6: D24.4@1554.53,-15.16 1554.65,-15.16 1572.39,2.57 1572.39,37.61 1555.16,54.84 U5.9@1555.16,72.52
NetD25_2: D25.2 U5.11 | length 58.8
  Top Layer w6: D25.2@1591.14,15.16 1594.53,18.55 U5.11@1594.53,72.52
NetD25_3: D25.3 U5.12 | length 60.4
  Top Layer w6: U5.12@1614.21,72.52 1614.21,22.41 D25.3@1621.46,15.16
NetD25_4: D25.4 U5.13 | length 126.5
  Top Layer w6: D25.4@1621.46,-15.16 1621.58,-15.16 1639.32,2.57 1639.32,97.62 U5.13@1643.74,102.05
NetD26_2: D26.2 U5.14 | length 128
  Top Layer w6: U5.14@1643.74,121.73 1653.27,121.73 1670,105 1670,70 1658.07,58.07 D26.2@1658.07,15.16
NetD26_3: D26.3 U5.15 | length 153.4
  Top Layer w6: U5.15@1643.74,141.42 1658.58,141.42 1685,115 1685,18.55 D26.3@1688.39,15.16
NetD26_4: D26.4 U5.16 | length 221.4
  Top Layer w6: U5.16@1643.74,161.1 1663.9,161.1 1706.25,118.75 1706.25,2.57 1688.51,-15.16 D26.4@1688.39,-15.16
NetD27_2: D27.2 U5.17 | length 211.2
  Top Layer w6: U5.17@1643.74,180.79 1664.21,180.79 1724.84,120.16 D27.2@1724.84,15.16
NetD27_3: D27.3 U5.18 | length 246.6
  Top Layer w6: U5.18@1643.74,200.47 1669.53,200.47 1755.16,114.84 D27.3@1755.16,15.16
NetD27_4: D27.4 U6.2 | length 264.5
  Top Layer w6: D27.4@1755.16,-15.16 1755.28,-15.16 1773.02,2.57 1773.02,143.02 1810.79,180.79 U6.2@1856.26,180.79
NetD28_2: D28.2 U6.3 | length 199
  Top Layer w6: D28.2@1791.93,15.16 1791.93,141.93 1811.1,161.1 U6.3@1856.26,161.1
NetD28_3: D28.3 U6.4 | length 166.8
  Top Layer w6: D28.3@1822.25,15.16 1815,22.41 1815,135 1821.42,141.42 U6.4@1856.26,141.42
NetD28_4: D28.4 U6.5 | length 170.9
  Top Layer w6: D28.4@1822.25,-15.16 1822.37,-15.16 1840.11,2.57 1840.11,34.89 1830,45 1830,115 1836.73,121.73 U6.5@1856.26,121.73
NetD29_2: D29.2 U6.6 | length 88
  Top Layer w6: U6.6@1856.26,102.05 1856.26,17.76 D29.2@1858.86,15.16
NetD29_3: D29.3 U6.7 | length 58.8
  Top Layer w6: U6.7@1885.79,72.52 1885.79,18.55 D29.3@1889.18,15.16
NetD29_4: D29.4 U6.8 | length 95.8
  Top Layer w6: D29.4@1889.18,-15.16 1889.3,-15.16 1907.03,2.57 1907.03,70.96 U6.8@1905.47,72.52
NetD30_2: D30.2 U6.9 | length 57.6
  Top Layer w6: U6.9@1925.16,72.52 1925.16,15.79 D30.2@1925.78,15.16
NetD30_3: D30.3 U6.11 | length 60.8
  Top Layer w6: D30.3@1956.1,15.16 1956.1,46.1 1964.53,54.53 U6.11@1964.53,72.52
NetD30_4: D30.4 U6.12 | length 99.4
  Top Layer w6: D30.4@1956.1,-15.16 1956.23,-15.16 1973.96,2.57 1973.96,43.96 1984.21,54.21 U6.12@1984.21,72.52
NetD31_2: D31.2 U6.13 | length 95.6
  Top Layer w6: D31.2@1992.71,15.16 1992.71,42.71 2013.74,63.74 U6.13@2013.74,102.05
NetD31_3: D31.3 U6.14 | length 133
  Top Layer w6: U6.14@2013.74,121.73 2028.27,121.73 2040,110 2040,65 2023.03,48.03 D31.3@2023.03,15.16
NetD31_4: D31.4 U6.15 | length 196.1
  Top Layer w6: U6.15@2013.74,141.42 2033.58,141.42 2052,123 2052,60.03 2040.89,48.92 2040.89,2.57 2023.16,-15.16 D31.4@2023.03,-15.16
NetD32_2: D32.2 U6.16 | length 183.3
  Top Layer w6: U6.16@2013.74,161.1 2038.9,161.1 2064,136 2064,19.52 D32.2@2059.64,15.16